# Altium PCB PCB_Suzie Q Adapter_2023-05-15.pcbdoc
Units mm, origin at the board's own origin, x right, y up, seen from the top; angles counter-clockwise.
Board outline 55.34 x 42.29 mm, 2 copper layers (Top Layer, Bottom Layer); 6 components, 7 nets, 62 pads, 10 vias.
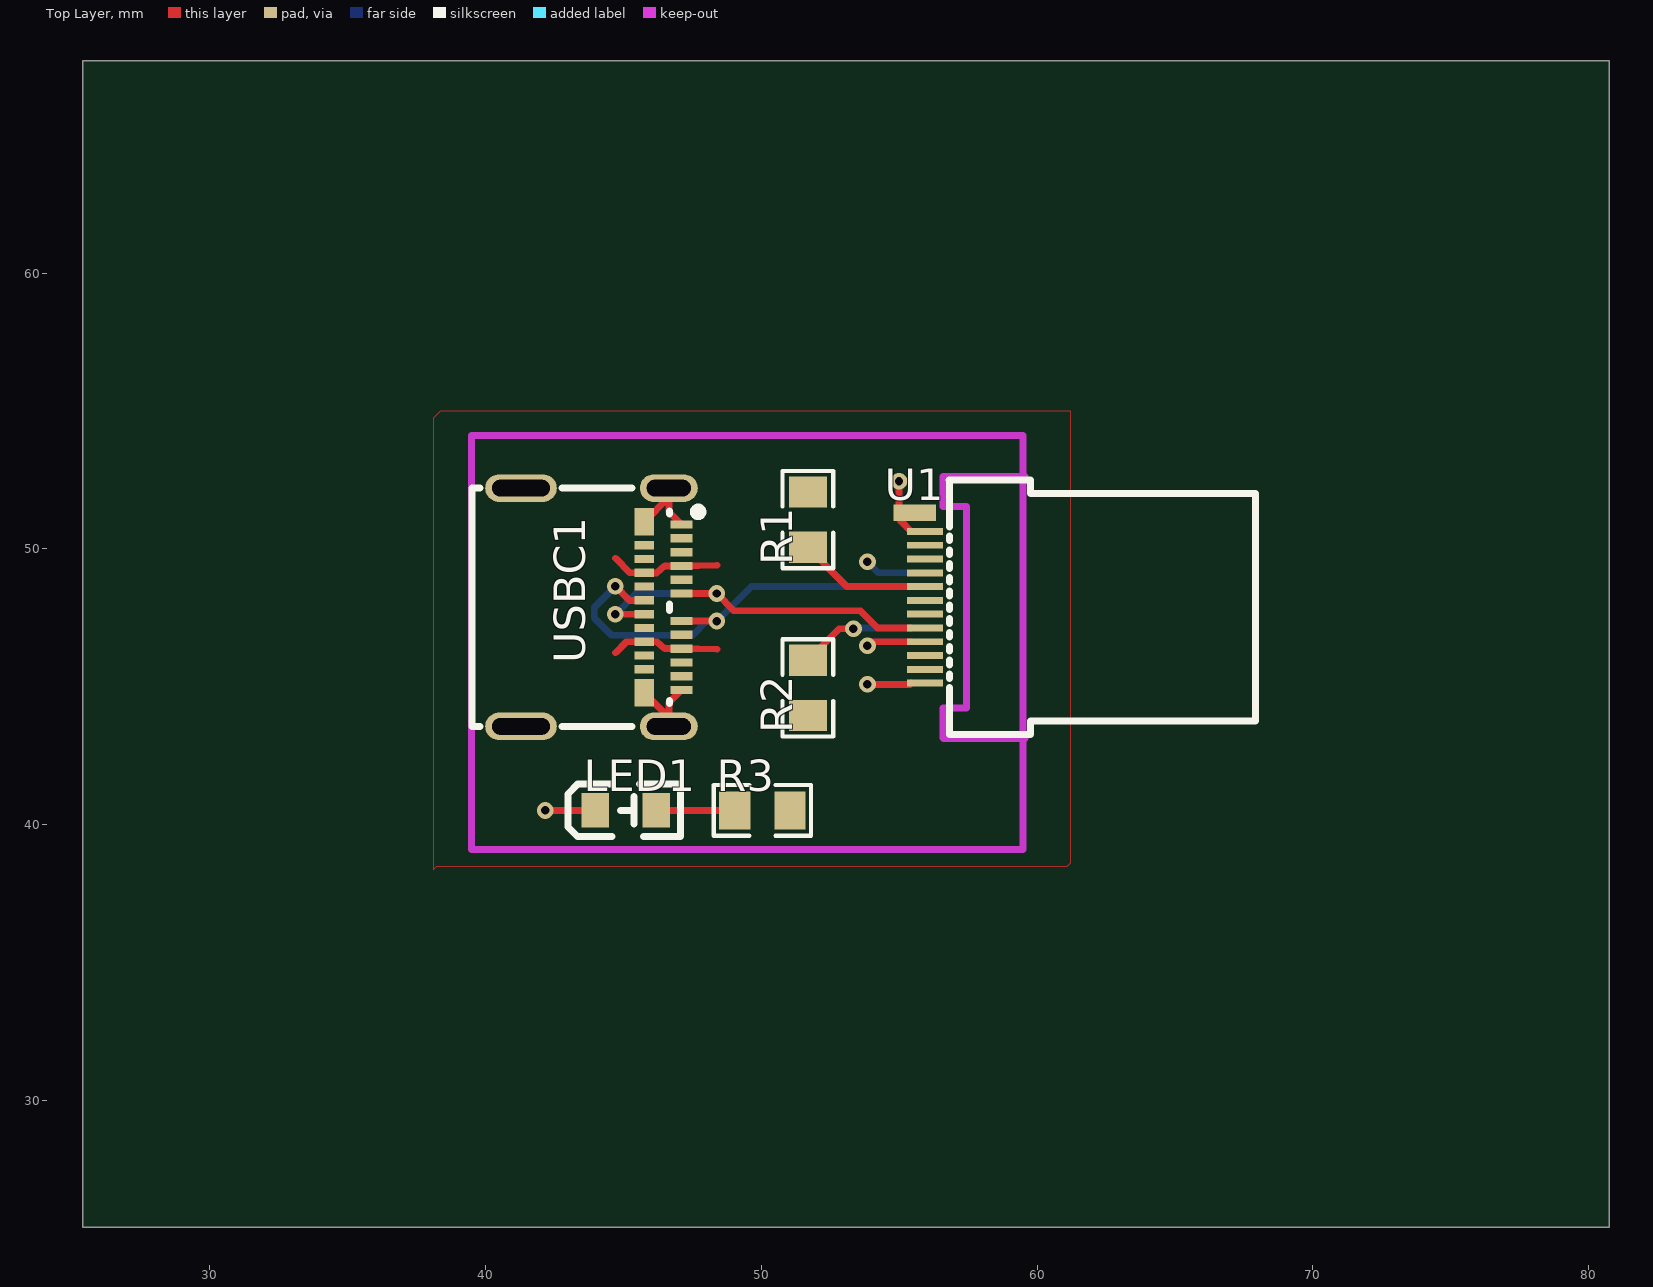
[diagram p0: Top Layer view]
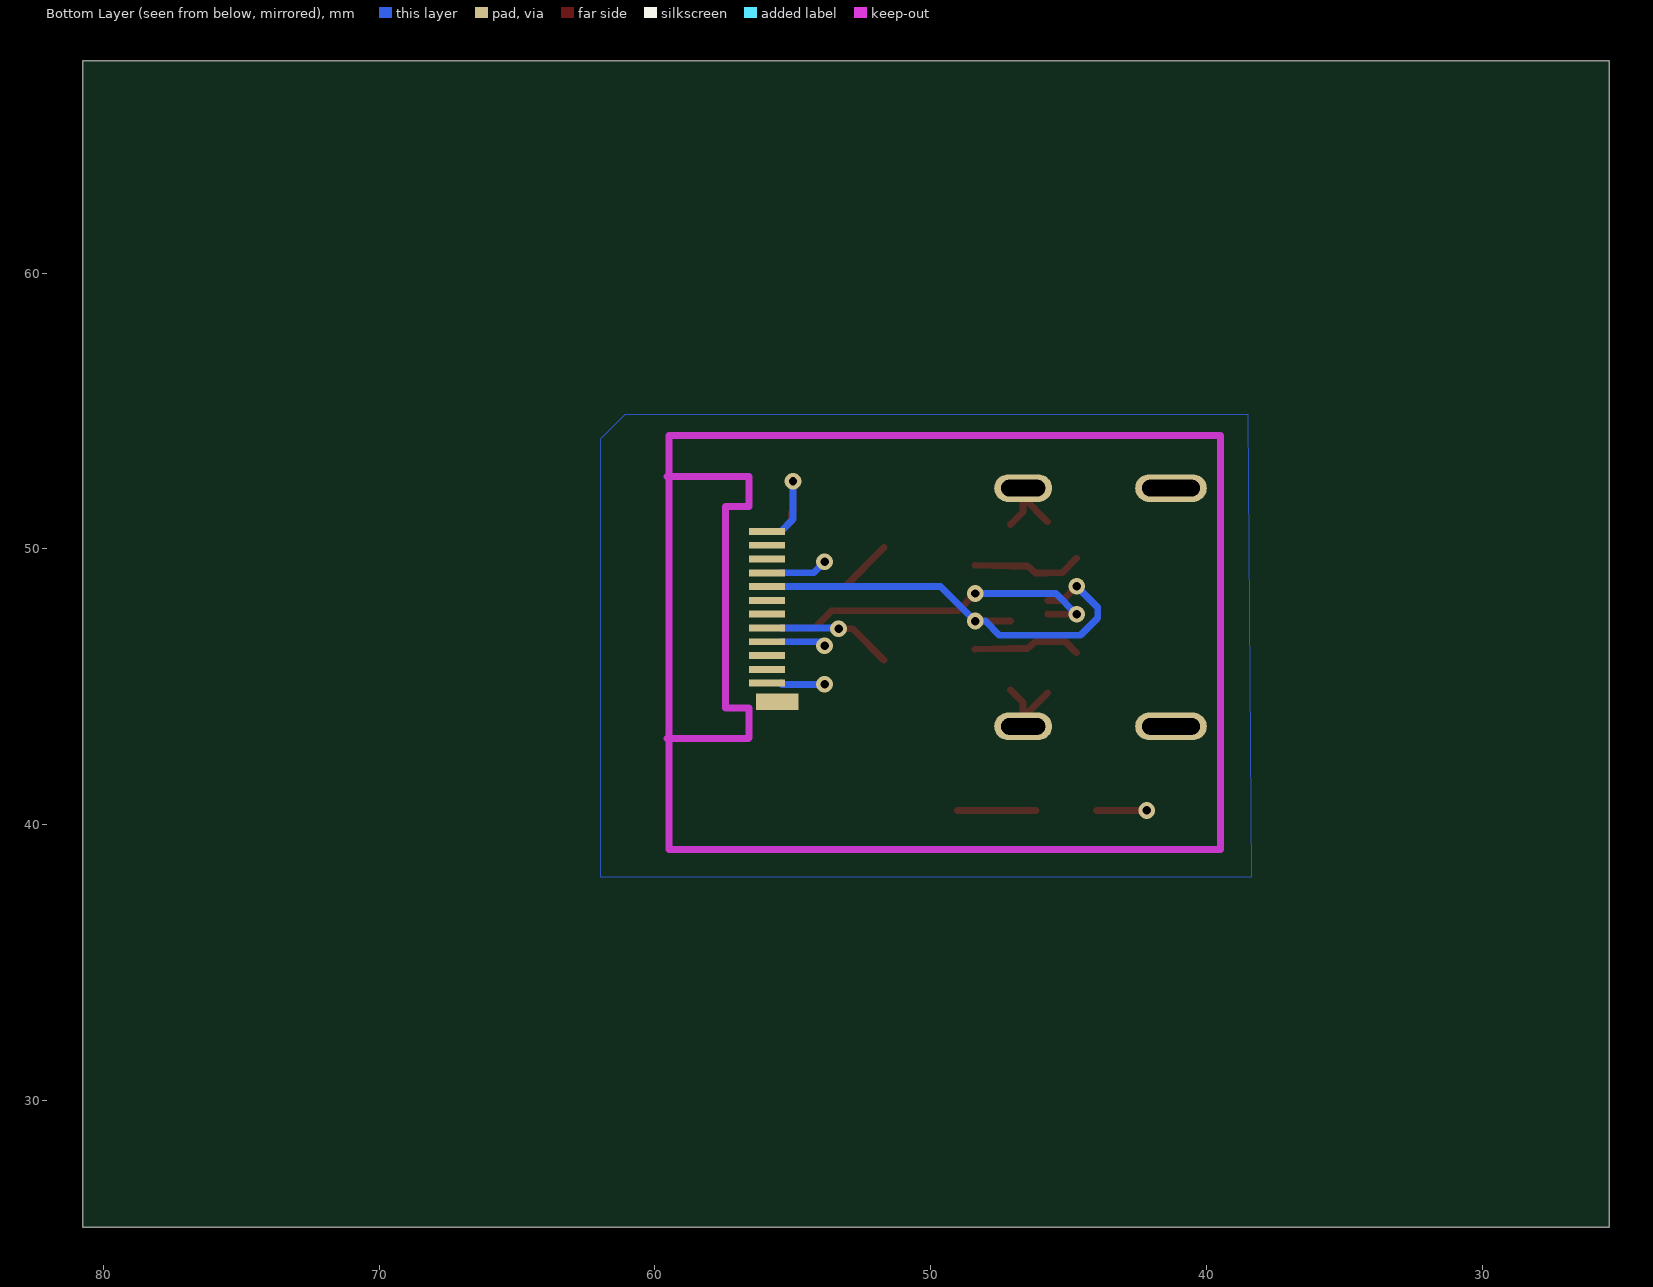
[diagram p1: Bottom Layer view, seen from below]

## Layer stack, top to bottom
Top Layer: signal copper (thickness not stored)
Dielectric: dielectric 0.32, FR-4, Dk 4.8
Bottom Layer: signal copper (thickness not stored)

## Board outline
80.742,25.4 25.4,25.4 25.4,67.691 80.742,67.691

## Components (designator, comment, footprint, x,y, rotation, side; value= is the part's Value field where it differs from the comment)
LED1 "LTST-C170GKT" LED0805-RD_GREEN 45.085,40.513 r0 top
R1 "22kΩ" R0805 51.689,51.054 r90 top
R2 "56kΩ" R0805 51.689,44.958 r270 top
R3 "68kΩ" R0805 50.038,40.513 r0 top
U1 "TYPEC-955-ARP24" TYPE-C-SMD_TYPEC-955-ARP24 55.753,47.879 r90 top
USBC1 "105450-0101" USB-C-SMD_TYPE-C-USB-18 44.196,47.879 r270 top

## Footprints (in the part's own frame and the unit in brackets; to place one, negate y for a bottom-side part, rotate by r counter-clockwise, add the part's x,y. Pads: shape width x height; smd on the part's side, far side on the other; paste and mask are expansions set on the pad)
LED0805-RD_GREEN [mm]
  rect 1x1.25 smd: 1(-1.1,0) 2(1.1,0)
  silkscreen extent -2.1,-0.95 1.98,0.96
R0805 [mm]
  rect 1.133x1.377 smd: 1(-1,0) 2(1,0)
  silkscreen extent -1.76,-0.92 1.76,0.92
TYPE-C-SMD_TYPEC-955-ARP24 [mm]
  rect 0.6x1.55 smd far side: 25(-3.42,0.188)
  rect 0.6x1.55 smd: 25(3.419,0.188)
  rect 0.25x1.3 smd: A1(2.749,-0.187) A2(2.249,-0.187) A3(1.749,-0.187) A4(1.249,-0.187) A5(0.749,-0.187) A6(0.249,-0.187) A7(-0.251,-0.187) A8(-0.751,-0.187) A9(-1.251,-0.187) A10(-1.751,-0.187) A11(-2.251,-0.187) A12(-2.751,-0.187)
  rect 0.25x1.3 smd far side: B1(-2.75,-0.187) B2(-2.25,-0.187) B3(-1.75,-0.187) B4(-1.25,-0.187) B5(-0.75,-0.187) B6(-0.25,-0.187) B7(0.25,-0.187) B8(0.75,-0.187) B9(1.25,-0.187) B10(1.75,-0.187) B11(2.25,-0.187) B12(2.75,-0.187)
  Keep-Out Layer lines w0.254: -4.751,-3.8 -4.751,-0.85 -4.738,-0.837 -4.601,-0.837 -3.651,-0.837 -3.651,-1.687 3.649,-1.687 3.649,-0.837 4.599,-0.837 4.749,-0.837 4.749,-3.8
  silkscreen extent -4.62,-12.16 4.61,-1.06
USB-C-SMD_TYPE-C-USB-18 [mm]
  oval 1x2.1 hole 0.6 slot 1.6 at 90 deg: 0(-4.32,2.45) 0(4.32,2.45)
  oval 1x2.6 hole 0.6 slot 2.1 at 90 deg: 0(-4.32,-2.91) 0(4.32,-2.91)
  rect 0.3x0.8 smd: A1(-3,2.91) A2(-2.5,2.91) A3(-2,2.91) A4(-1.5,2.91) A5(-1,2.91) A6(-0.5,2.91) A7(0.5,2.91) A8(1,2.91) A9(1.5,2.91) A10(2,2.91) A11(2.5,2.91) A12(3,2.91)
  rect 1x0.7 smd: B1(3.1,1.56) B12(-3.1,1.56)
  rect 0.3x0.7 smd: B2(2.25,1.56) B3(1.75,1.56) B4(1.25,1.56) B5(0.75,1.56) B6(0.25,1.56) B7(-0.25,1.56) B8(-0.75,1.56) B9(-1.25,1.56) B10(-1.75,1.56) B11(-2.25,1.56)
  silkscreen extent -4.32,-4.68 4.32,3.66

## Via types
v1: diameter 0.61, hole 0.305, Top Layer to Bottom Layer, tented both sides, 10 vias

## Nets (pads, with @x,y where several pads share a name; then routed paths per layer and width w, separated by ;. In a path a pad name is that pad's centre, name@x,y a point inside that pad or via, vN(x,y) a via of type N, cw(c..) or ccw(c..) an arc to the next point about the centre after c; other vN are vias at no path point)
D+: U1.A8 USBC1.A6 USBC1.B6 | length 13.9
  Top Layer w0.25: v1(44.704,47.625) 45.752,47.625 USBC1.B6 ; USBC1.A6 v1(48.387,48.379) 49.014,47.752 53.594,47.752 54.217,47.129 U1.A8@55.432,47.129
  Bottom Layer w0.25: v1(44.704,47.625) 45.458,48.379 v1(48.387,48.379)
D-: U1.B8 USBC1.A7 USBC1.B7 | length 16.5
  Top Layer w0.25: v1(44.704,48.641) 45.216,48.129 USBC1.B7 ; USBC1.A7 v1(48.387,47.379)
  Bottom Layer w0.25: v1(44.704,48.641) 43.942,47.879 43.942,47.498 44.577,46.863 47.498,46.863 48.014,47.379 v1(48.387,47.379) 49.637,48.629 U1.B8@55.432,48.629
GND: LED1.1 U1.25 U1.A1 U1.A12 U1.B1 U1.B12 USBC1.0 USBC1.A1 USBC1.A12 USBC1.B1 USBC1.B12 | length 15.2
  Top Layer w0.25: v1(42.164,40.513) LED1.1 ; USBC1.B1 46.646,43.889 46.646,43.559 46.646,44.419 USBC1.A12 ; USBC1.B12 46.646,51.869 46.646,52.199 46.646,51.339 USBC1.A1 ; v1(53.848,45.085) 55.389,45.085 U1.A12@55.432,45.129 ; v1(54.991,52.451) 54.991,51.365 55.057,51.299 55.057,51.004 U1.A1@55.432,50.629
  Bottom Layer w0.25: v1(53.848,45.085) 55.388,45.085 U1.B1@55.432,45.129 ; v1(54.991,52.451) 54.991,51.07 U1.B12@55.432,50.629
LED1_2: LED1.2 R3.1 | length 2.9
  Top Layer w0.25: LED1.2 R3.1
U1_A5: R1.1 U1.A5 | length 4.3
  Top Layer w0.25: R1.1 53.099,48.628 U1.A5@55.433,48.628
U1_B5: R2.1 U1.B5 | length 4.2
  Top Layer w0.25: R2.1 52.832,47.101 v1(53.34,47.101)
  Bottom Layer w0.25: v1(53.34,47.101) 53.368,47.129 U1.B5@55.432,47.129
VBUS: R1.2 R2.2 R3.2 U1.A4 U1.A9 U1.B4 U1.B9 USBC1.A4 USBC1.A9 USBC1.B4 USBC1.B9 | length 13
  Top Layer w0.25: 44.704,46.228 45.105,46.629 USBC1.B4 46.208,46.629 46.505,46.378 USBC1.A9 48.387,46.355 ; 44.704,49.657 45.232,49.129 USBC1.B9 46.208,49.129 46.505,49.38 USBC1.A4 48.387,49.403 ; v1(53.848,46.482) 53.995,46.629 U1.A9@55.432,46.629
  Bottom Layer w0.25: v1(53.848,46.482) 53.995,46.629 U1.B4@55.432,46.629 ; v1(53.848,49.53) 54.249,49.129 U1.B9@55.432,49.129
pads on no net: U1.A2 U1.A3 U1.A6 U1.A7 U1.A10 U1.A11 U1.B2 U1.B3 U1.B6 U1.B7 U1.B10 U1.B11 USBC1.A2 USBC1.A3 USBC1.A5 USBC1.A8 USBC1.A10 USBC1.A11 USBC1.B2 USBC1.B3 USBC1.B5 USBC1.B8 USBC1.B10 USBC1.B11

## Polygon pours and split planes (outlines as drawn)
GND on Bottom Layer (solid): 38.481,54.864 61.087,54.864 61.976,53.975 61.976,38.1 38.481,38.1 38.354,38.1
VBUS on Top Layer (solid): 38.354,54.991 38.1,54.737 38.1,38.354 38.227,38.481 61.087,38.481 61.214,38.608 61.214,54.991